# Allegro board FULL.brd
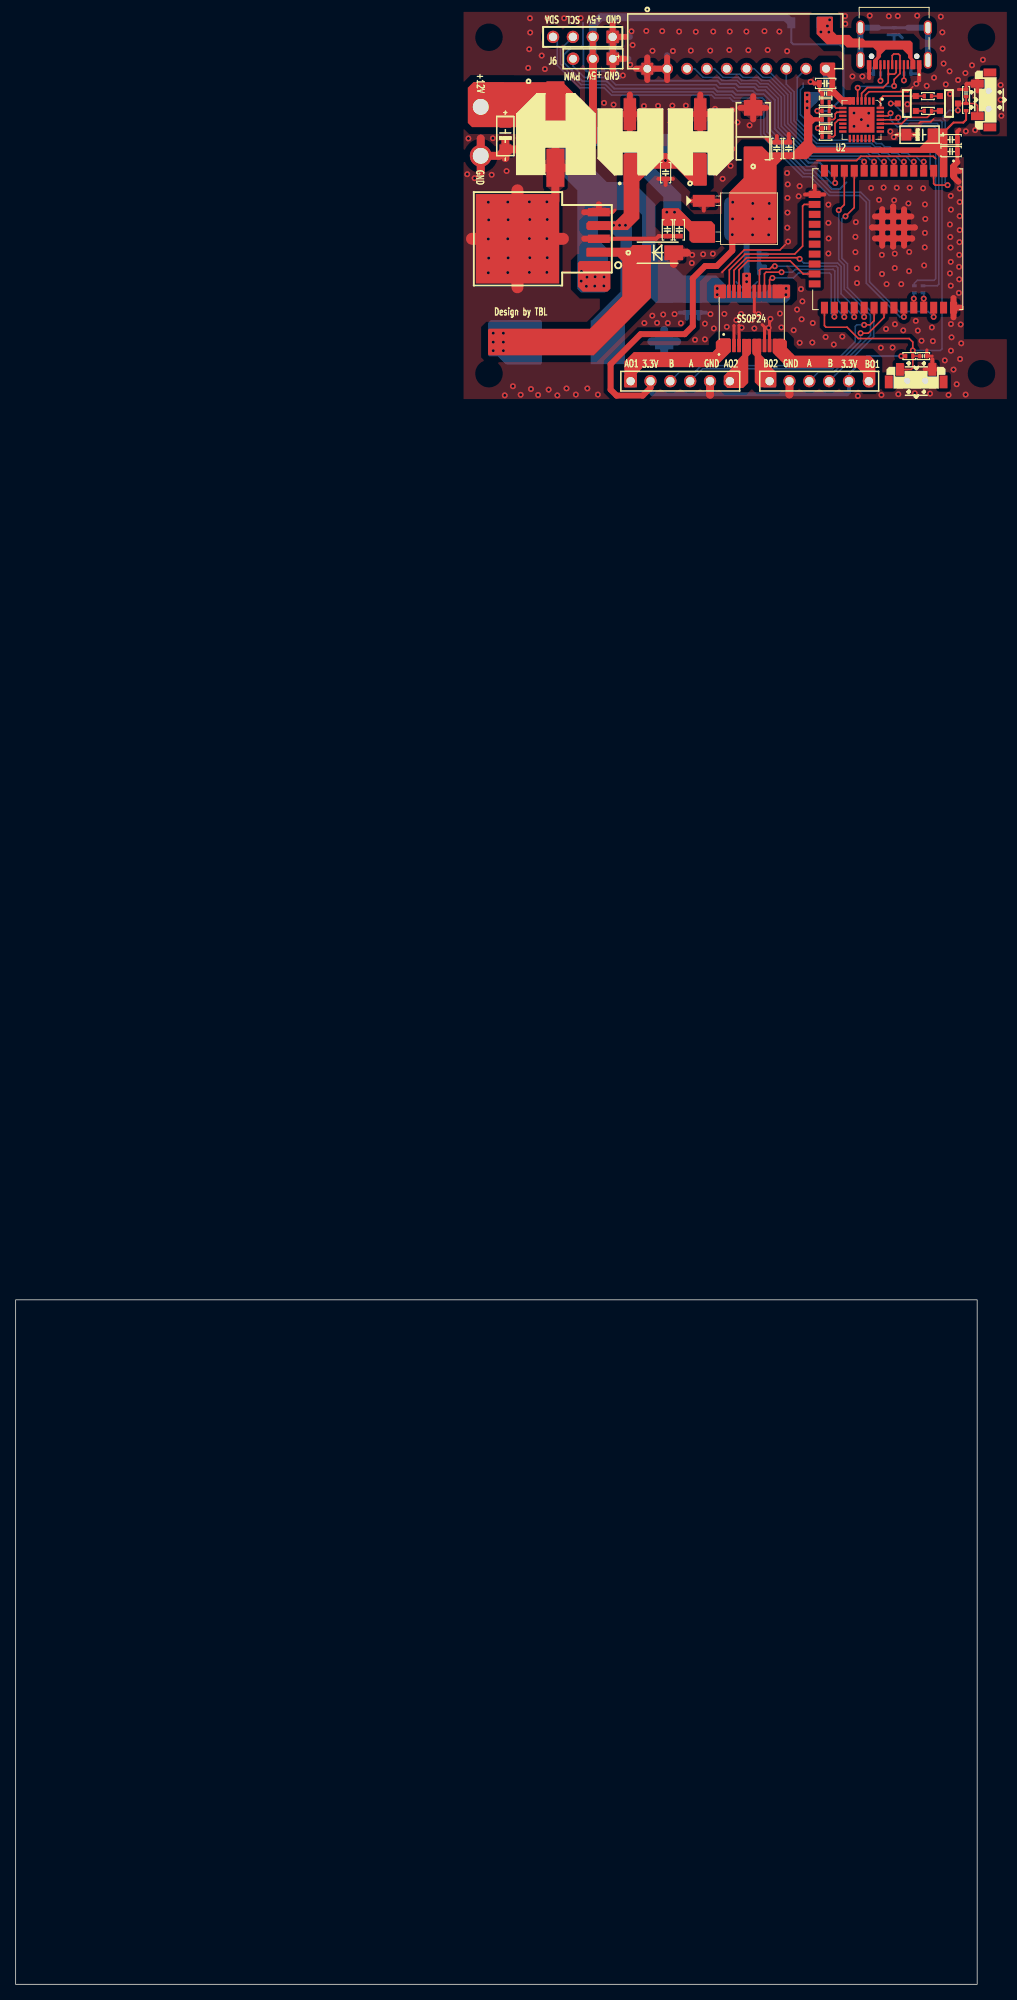
[diagram p0: board, top side]
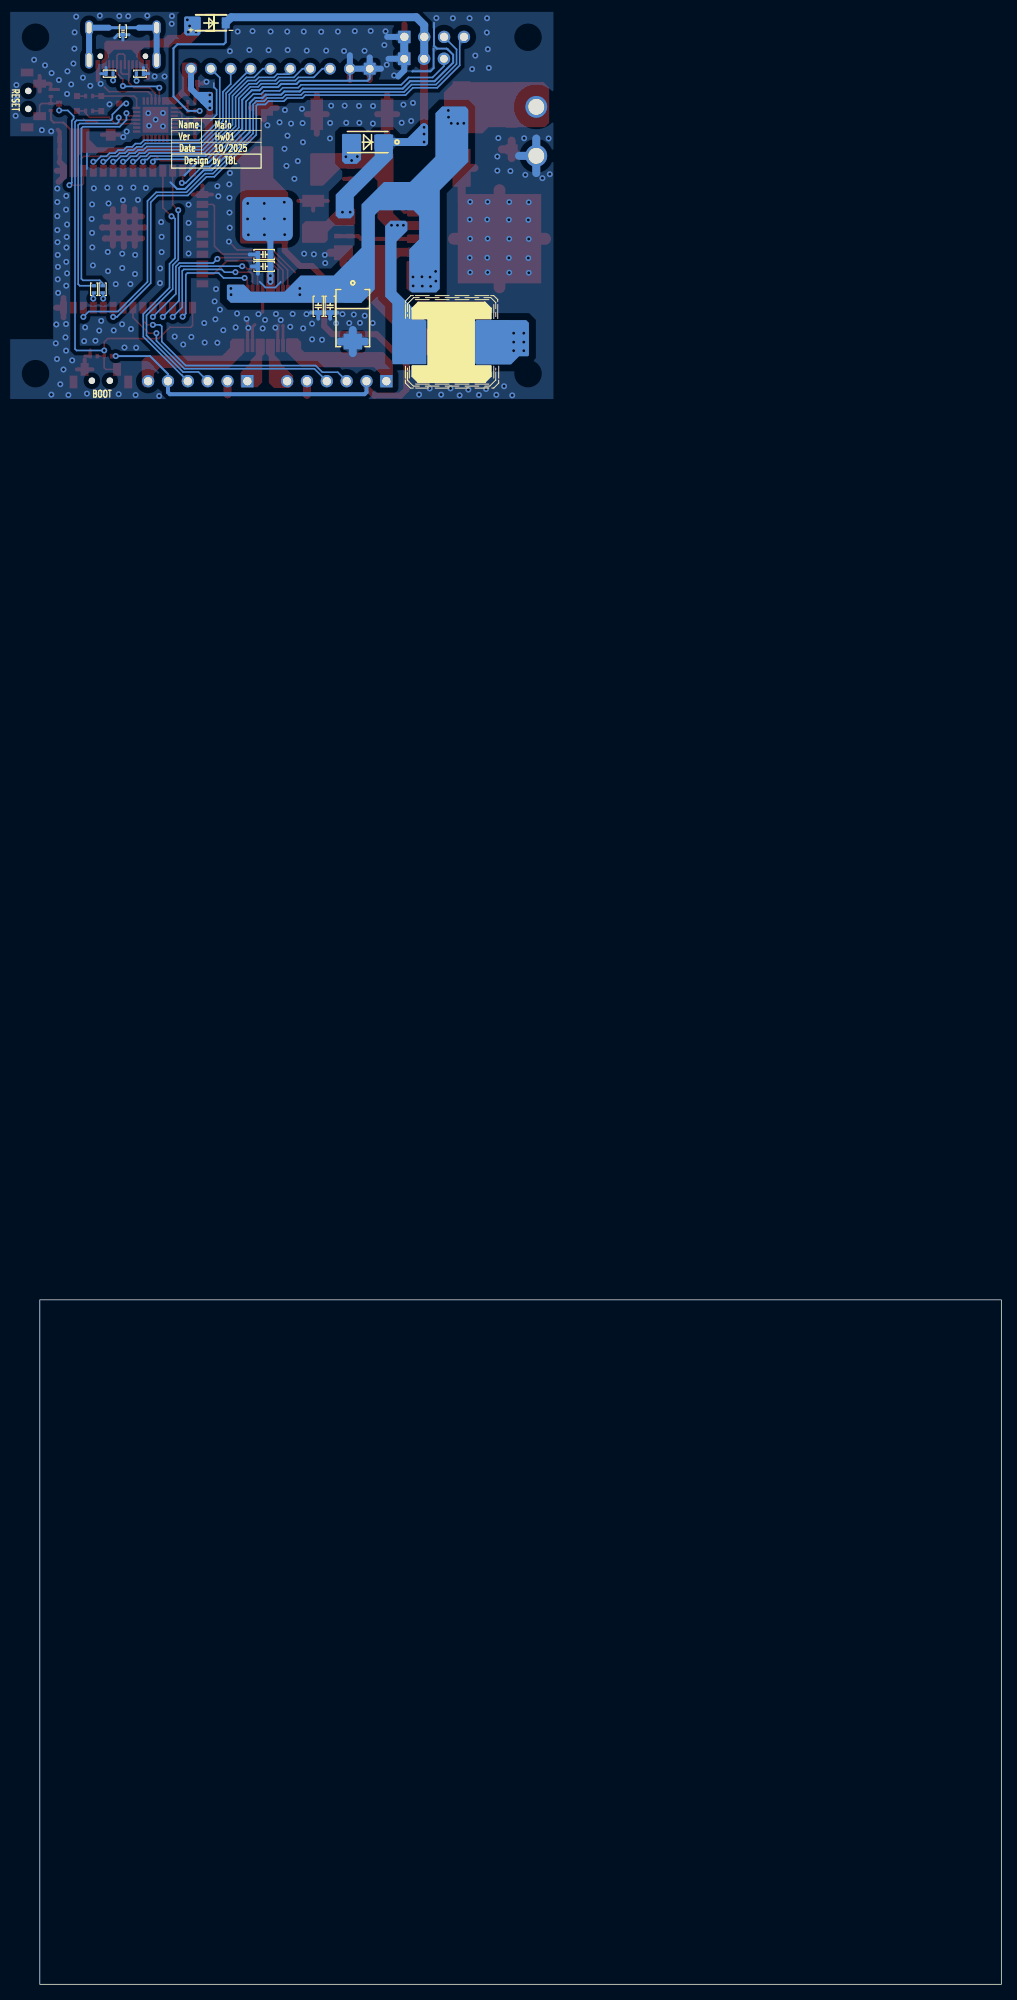
[diagram p1: board, bottom side, seen from below]

Outline 123 x 87.5 mm; copper layers: TOP, BOTTOM. Coordinates in mm from the lower left corner of the outline.
Outline path: rectangle 0,0 123,87.5

## Design rules (mm)
constraint set DEFAULT: min track width 0.203

## Placement (name value [footprint] x y rotation side)
C2  100uF  [C1206]  117.33 236.43 180 top
C3  1uF  [C0603]  119.67 235.79 0 top
C4  0.1uF  [C0603]  119.67 234.27 0 top
C5  0.1uF  [C0402]  121.58 241.77 90 top
C6  0.1uF  [C0402]  116.11 208.13 0 top
C7  1uF  [C0603]  103.61 242.98 180 top
C8  0.1uF  [C0402]  103.61 241.67 180 top
C9  0.1uF  [C0402]  112.38 249.66 270 bottom
C10  0.1uF  [C0402]  103.61 237.27 180 top
C11  470uF  [RAD_SIZE_F]  87.57 235.51 90 top
C12  0.1uF  [C0603]  83.14 231.58 270 top
C13  470uF  [RAD_SIZE_F]  78.57 235.51 90 top
C14  0.1uF  [C0603]  83.37 224.27 270 top
C15  1uF  [C0603]  84.89 224.27 270 top
C16  0.1uF  [C0603]  98.89 234.67 90 top
C17  1uF  [C0603]  97.37 234.67 90 top
C18  100uF  [C2312]  94.34 236.87 90 top
C19  100uF  [C2312]  82.96 212.99 270 bottom
C21  1uF  [C0603]  94.31 219.59 0 bottom
C22  0.1uF  [C0603]  94.31 221.12 0 bottom
C23  0.1uF  [C0603]  85.86 214.49 270 bottom
C30  330uF  [CASE_G]  69.04 236.51 270 top
C31  0.1uF  [C1206]  62.64 237.96 270 top
C32  0.1uF  [C0603]  87.38 214.49 270 bottom
D1  1N4148  [SOD_123]  101.07 250.73 180 bottom
D2  1N5819  [DO_214AC]  81.06 235.49 0 bottom
D3  1N5819  [DO_214AC]  82.13 221.35 0 top
IC1  TB6612FNG  [SSOP24]  94.17 212.94 90 top
J2  TYPE C  [TYPE-C-16P]  112.38 250.11 180 top
J4  HEADER1X10  [SHDRV10W102P0_254_1X10]  80.8 244.87 0 top
J5  -  [HEADER1X4]  72.58 248.93 90 top
J6  -  [HEADER1X3]  73.85 246.14 180 top
J7  HEADER1X6_RIGHT  [HEADER1X6]  96.45 204.92 0 top
J8  HEADER1X6_LEFT  [HEADER1X6]  78.67 204.92 0 top
L1  33uH  [DR127_SMD_IND]  70.39 209.89 0 bottom
Q1  MMBT2222  [SOT_23]  118.24 241.37 270 top
Q2  MMBT2222  [SOT_23]  115.15 239.47 90 top
R1  0  [R0402]  116.06 216.67 90 bottom
R2  10K  [R0402]  121.58 239.97 270 top
R3  10K  [R0402]  114.31 208.13 180 top
R4  0  [R0402]  114.96 216.67 90 bottom
R5  10K  [R0402]  116.7 241.36 0 top
R6  10K  [R0402]  116.7 239.47 0 top
R7  5.1K  [R0402]  114.08 244.23 0 bottom
R8  5.1K  [R0402]  110.19 244.23 180 bottom
R9  10K  [R0402]  103.61 239.47 0 top
R10  10K  [R0402]  103.61 236.17 0 top
R11  10K  [R0402]  103.61 240.57 180 top
R12  1K  [R0402]  103.61 238.37 180 top
SW1  BUTTON  [BUTTON_SMD_2PIN_3X6X3_5_RA]  115.19 204.98 180 top
SW2  BUTTON  [BUTTON_SMD_2PIN_3X6X3_5_RA]  124.48 240.88 270 top
T6  Test_Point_Pwr_80  [TEST_POINT_PWR_80]  59.49 239.99 0 top
T9  Test_Point_Pwr_80  [TEST_POINT_PWR_80]  59.49 233.73 0 top
U1  -  [ESP32_WROOM_32U]  111.56 223.07 270 top
U2  CP2102  [QFN28_5X5]  108.21 238.34 270 top
U3  LM2596S-5.0  [TO_263_5]  67.88 223.12 90 top
U5  LM1086  [DPAK]  91.98 225.69 270 top

## Library data of the parts
C2 C11 C13 C18 C19 C30 = POL_CAP
C3 C4 C7 C12 C14-C17 C21-C23 C32 = NPOL_CAP: User Part Number: ***
C5 C6 C8-C10 C31 = NPOL_CAP
D1 = DIODE
D2 D3 = DIODE_AC
IC1 = TB6612FNG
J2 = TYPE_C_0
J4 = HEADER1X10
J5 = HEADER1X4
J6 = HEADER1X3
J7 J8 = HEADER1X6
L1 = IND_FERRITE
Q1 Q2 = BJT_NPN
R1-R12 = RES
SW1 SW2 = SW_PUSHBUTTON_SPST_2P
T6 T9 = TestPoint
U1 = ESP32_WROOM_32U
U2 = CP2102_QFN28_0
U3 = LM2575_TO
U5 = LM1086_0

## Footprints (pads in the part's own frame, mm; a bottom-side part is the same pattern mirrored in y, then rotated)
BUTTON_SMD_2PIN_3X6X3_5_RA
  round 0.838 hole 0.813: (-1.15,0) (1.15,0)
  rect 1.016x1.626 smd: 1(-2.075,-1.45) 2(2.075,-1.45) 3(-3.5,0.15) 4(3.5,0.15)
C0402
  rect 0.399x0.599 smd: 1(-0.45,0) 2(0.45,0)
C0603
  rect 0.599x0.899 smd: 1(-0.8,0) 2(0.8,0)
C1206
  rect 1.27x1.524 smd: 1(0,0) 2(3.4,0)
C2312
  rect 1.999x2.349 smd: 1(-3,0) 2(3,0)
CASE_G
  rect 4.849x2.301 smd: 1(-4.318,0) 2(4.318,0)
DO_214AC
  rect 2.4x1.9 smd: A(2.05,0) C(-2.05,0)
DPAK
  rect 1.524x2.794 smd: 1(-2.286,-3.95) 3(2.286,-3.95)
  rect 6.299x6.096 smd: 2(0,2.3)
DR127_SMD_IND
  rect 4.318x5.588 smd: 1(-5.334,0) 2(5.334,0)
ESP32_WROOM_32U
  rect 1.5x0.9 smd: 1(-8.75,8.41) 2(-8.75,7.14) 3(-8.75,5.87) 4(-8.75,4.6) 5(-8.75,3.33) 6(-8.75,2.06) 7(-8.75,0.79) 8(-8.75,-0.48) 9(-8.75,-1.75) 10(-8.75,-3.02) 11(-8.75,-4.29) 12(-8.75,-5.56) 13(-8.75,-6.83) 14(-8.75,-8.1) 25(8.75,-8.1) 26(8.75,-6.83) 27(8.75,-5.56) 28(8.75,-4.29) 29(8.75,-3.02) 30(8.75,-1.75) 31(8.75,-0.48) 32(8.75,0.79) 33(8.75,2.06) 34(8.75,3.33) 35(8.75,4.6) 36(8.75,5.87) 37(8.75,7.14) 38(8.75,8.41)
  rect 0.9x1.5 smd: 15(-5.715,-9.35) 16(-4.445,-9.35) 17(-3.175,-9.35) 18(-1.905,-9.35) 19(-0.635,-9.35) 20(0.635,-9.35) 21(1.905,-9.35) 22(3.175,-9.35) 23(4.445,-9.35) 24(5.715,-9.35)
  rect 0.9x0.9 smd: 39_1(-2.9,2.09) 39_2(-1.5,2.09) 39_3(-0.1,2.09) 39_4(-2.9,0.69) 39_5(-1.5,0.69) 39_6(-0.1,0.69) 39_7(-2.9,-0.71) 39_8(-1.5,-0.71) 39_9(-0.1,-0.71)
HEADER1X3
  rect 1.6x1.6 hole 1.001: 1(-2.54,0)
  round 1.6 hole 1.001: 2(0,0) 3(2.54,0)
HEADER1X4
  rect 1.575x1.575 hole 1.067: 1(0,-3.79)
  round 1.575 hole 1.067: 2(0,-1.25) 3(0,1.29) 4(0,3.83)
HEADER1X6
  rect 1.575x1.575 hole 1.067: 1(0,0)
  round 1.575 hole 1.067: 2(2.54,0) 3(5.08,0) 4(7.62,0) 5(10.16,0) 6(12.7,0)
QFN28_5X5
  rect 0.95x0.305 smd: 1(-2.4,1.5) 2(-2.4,1) 3(-2.4,0.5) 4(-2.4,0) 5(-2.4,-0.5) 6(-2.4,-1) 7(-2.4,-1.5) 15(2.4,-1.5) 16(2.4,-1) 17(2.4,-0.5) 18(2.4,0) 19(2.4,0.5) 20(2.4,1) 21(2.4,1.5)
  rect 0.305x0.95 smd: 8(-1.5,-2.4) 9(-1,-2.4) 10(-0.5,-2.4) 11(0,-2.4) 12(0.5,-2.4) 13(1,-2.4) 14(1.5,-2.4) 22(1.5,2.4) 23(1,2.4) 24(0.5,2.4) 25(0,2.4) 26(-0.5,2.4) 27(-1,2.4) 28(-1.5,2.4)
  rect 3.302x3.302 smd: 29(0,0)
R0402
  rect 0.399x0.599 smd: 1(-0.45,0) 2(0.45,0)
RAD_SIZE_F
  rect 4.049x1.6 smd: 1(-3.55,0) 2(3.55,0)
SHDRV10W102P0_254_1X10
  rect 1.501x1.501 hole 1.001: 1(0,0)
  round 1.501 hole 1.001: 2(2.54,0) 3(5.08,0) 4(7.62,0) 5(10.16,0) 6(12.7,0) 7(15.24,0) 8(17.78,0) 9(20.32,0) 10(22.86,0)
SOD_123
  rect 1.016x1.397 smd: 1(-1.854,0) 2(1.854,0)
SOT_23
  rect 0.762x0.762 smd: 1(0,0) 2(1.9,0) 3(0.95,2.291)
SSOP24
  custom 1.7x0.48 smd: 1(-3.46,3.575) 2(-3.46,2.925) 3(-3.46,2.275) 4(-3.46,1.625) 5(-3.46,0.975) 6(-3.46,0.325) 7(-3.46,-0.325) 8(-3.46,-0.975) 9(-3.46,-1.625) 10(-3.46,-2.275) 11(-3.46,-2.925) 12(-3.46,-3.575) 13(3.46,-3.575) 14(3.46,-2.925) 15(3.46,-2.275) 16(3.46,-1.625) 17(3.46,-0.975) 18(3.46,-0.325) 19(3.46,0.325) 20(3.46,0.975) 21(3.46,1.625) 22(3.46,2.275) 23(3.46,2.925) 24(3.46,3.575)
TEST_POINT_PWR_80
  round 2.794 hole 2.032: 1(0,0)
TO_263_5
  rect 1.067x2.794 smd: 1(-3.404,-6.731) 2(-1.702,-6.731) 3(0,-6.731) 4(1.702,-6.731) 5(3.404,-6.731)
  rect 11.43x10.668 smd: 6(0,3.683)
TYPE-C-16P
  round 0.7 hole 0.7 unplated: (-2.89,3.65) (2.89,3.65)
  rect 0.6x1.15 smd: A1_B12(-3.2,4.725) A4_B9(-2.4,4.725) A9_B4(2.4,4.725) A12_B1(3.2,4.725)
  rect 0.3x1.15 smd: A5(-1.25,4.725) A6(-0.25,4.725) A7(0.25,4.725) A8(1.25,4.725) B5(1.75,4.725) B6(0.75,4.725) B7(-0.75,4.725) B8(-1.75,4.725)
  oval 1.05x1.85 hole 0.65x1.45: SH1(-4.32,0) SH2(4.32,0)
  oval 1.05x2.15 hole 0.65x1.75: SH3(-4.32,4.15) SH4(4.32,4.15)

## Nets
+3.3V: C2.1 C3.1 C4.1 C7.1 C8.1 C16.1 C17.1 C18.1 C21.1 C22.1 IC1.19 IC1.20 J4.10 J7.5 J8.2 R2.2 R3.2 R12.2 U1.2 U2.6(VDD) U2.7 U5.2(OUTPUT)
+5V: C14.1 C15.1 D1.2(CATHODE) D2.C(CATHODE) J5.2 J6.2 R9.1 U5.3
+12V: C19.1 C23.1 C30.1 C31.1 C32.1 IC1.13 IC1.14(VM3) IC1.24 T6.1(T) U3.1(VIN)
GND: C2.2 C3.2 C4.2 C5.2 C6.2 C7.2 C8.2 C9.2 C10.2 C11.2 C12.2 C13.2 C14.2 C15.2 C16.2 C17.2 C18.2 C19.2 C21.2 C22.2 C23.2 C30.2 C31.2 C32.2 D3.A IC1.3 IC1.4 IC1.9 IC1.10 IC1.18 J2.A1_B12 J2.A12_B1 J4.1 J4.2 J5.1 J6.1 J7.2 J8.5 R7.2 R8.2 R10.1 R11.2 SW1.1 SW2.1 T9.1(T) U1.1 U1.15 U1.38 U1.39_1 U1.39_2 U1.39_3 U1.39_4 U1.39_5 U1.39_6 U1.39_7 U1.39_8 U1.39_9 U2.3 U2.29 U3.3 U3.5 U3.6 U5.1
VBUS: D1.1 J2.A4_B9 J2.A9_B4(VBUS#A9_B4)
A1: J4.9 U1.4
A2: J4.8 U1.5
A3: J4.7 U1.6
A4: J4.6 U1.7
A5: J4.5 U1.8
A6: J4.4 U1.9
A7: J4.3 U1.10
AIN1: IC1.21 U1.23
AIN2: IC1.22 U1.29
AO1: IC1.1 IC1.2 J8.1
AO2: IC1.5 IC1.6 J8.6
BIN1: IC1.17 U1.28
BIN2: IC1.16 U1.27
BO1: IC1.11 IC1.12 J7.6
BO2: IC1.7 IC1.8 J7.1
D+: J2.A6 J2.B6 U2.4
D-: J2.A7 J2.B7 U2.5
DTR: Q2.2 R5.1 U2.28
EN: C5.1 Q1.3(E) R2.1 SW2.2 U1.3
IO0_BOOT: C6.1 Q2.3(E) R3.1 SW1.2 U1.25
IO2: U1.24
IO12: U1.14
IO23: U1.37
M1_EC_A: J8.4 U1.31
M1_EC_B: J8.3 U1.30
M2_EC_A: J7.3 U1.12
M2_EC_B: J7.4 U1.11
PWM_SV: J6.3 U1.13
PWMA: IC1.23 U1.16
PWMB: IC1.15 U1.26
RST: Q1.2 R6.2 U2.24
RX: R1.2 U2.25
RXD0: R4.1 U1.34
SCL: J5.3 U1.36
SDA: J5.4 U1.33
TX: R4.2 U2.26
TXD0: R1.1 U1.35(TXD0/IO1)
N15842419: C11.1 C12.1 C13.1 D2.A L1.2 U3.4
N15842519: D3.C(CATHODE) L1.1 U3.2
N15929869: C9.1 J2.SH1 J2.SH2 J2.SH3 J2.SH4
N15929977: J2.A5 R7.1
N15930015: J2.B5 R8.1
N15930117: R9.2 R11.1 U2.8
N15930121: C10.1 R12.1 U2.9
N15930125: R10.2 U2.11
N15936616: Q1.1 R5.2
N15936658: Q2.1 R6.1

Pads without a net: J2 A8 B8; SW1 3 4; SW2 3 4; U1 17 18 19 20 21 22 32; U2 1 2 10 12 13 14 15 16 17 18 19 20 21 22 23 27

## Via types
v1: diameter 0.762, hole 0.381, TOP to BOTTOM, 340 vias

## Routing (per net, layer and track width the routed paths; a pad name or vN(x,y) marks a point on that pad's centre or on a via; arc(x,y) is an arc through that point)
+3.3V: length 98.2
  TOP w0.254: 119.01,237.02 119.97,237.98 121.22,237.98 121.58,238.34 R2.2 ; R3.2 v1(113.29,208.13)
  TOP w0.762: J8.2 81.21,204.07 80.22,203.08 76.87,203.08 76.11,203.85 76.11,207.1 79.94,210.93 85.58,210.93 86.62,211.97 86.62,218.07 88.2,219.64 89.69,219.64 91.68,221.63 v1(91.68,223.66) ; v1(101.25,241.51) v1(101.25,240.68) v1(101.25,239.86)
  BOTTOM w0.254: J7.5 106.61,205.85 108.89,208.13 v1(113.29,208.13)
  BOTTOM w0.508: J8.2 81.21,203.52 81.46,203.26 106.35,203.26 106.61,203.52 J7.5
  BOTTOM w0.762: 102.9,241.51 103.66,242.28 J4.10 ; 102.9,241.51 102.09,240.71 ; 102.9,241.51 102.09,241.51 ; 102.09,240.71 102.09,240.7 v1(101.25,239.86) v1(101.25,240.68) ; 102.09,240.71 102.09,241.51 ; 102.09,241.51 v1(101.25,241.51) v1(101.25,240.68) ; 102.09,241.51 v1(101.25,240.68) ; v1(94.27,223.63) 93.5,222.87 C22.1 C21.1 v1(93.5,218.4) v1(93.5,217.64)
  vias: v1(91.73,227.8) v1(91.7,225.66) v1(94.29,227.65) v1(94.28,225.69) v1(96.32,223.63) v1(96.4,227.65) v1(96.43,225.66)
+5V: length 76.3
  TOP w0.254: R9.1 v1(102.55,239.47)
  TOP w0.762: J5.2 73.83,246.16 J6.2
  TOP w1.016: J6.2 v1(73.85,237.37) v1(73.85,236.51) v1(73.85,235.49)
  BOTTOM w0.254: v1(102.55,239.47) 104.06,239.47 105.9,241.31 105.9,247.48 105.39,247.99 99.47,247.99 99.22,248.24 D1.2
  BOTTOM w1.016: 75.72,235.49 74.81,235.49 ; 75.72,235.49 v1(73.85,237.37) v1(73.85,236.51) 73.85,236.46 ; 75.72,235.49 D2.C ; 74.81,235.49 73.85,236.46 ; 74.81,235.49 v1(73.85,235.49) 73.85,236.46 ; J6.2 73.83,246.16 J5.2 73.83,250.43 74.84,251.44 98.51,251.44 D1.2 ; v1(84.28,226.53) v1(83.29,226.53)
+12V:
  vias: v1(68.77,237.88) v1(69.55,237.86) v1(70.37,237.88) v1(70.75,239.53) v1(70.72,238.67) v1(72.37,218.96) v1(72.35,217.71) v1(73.08,218.22) v1(73.01,217.05) v1(74.07,217.08) v1(74.12,218.27) v1(75.27,218.25) v1(75.24,217.1) v1(89.75,216.77) v1(89.75,215.99) v1(98.56,216.77) v1(98.53,215.99)
GND: length 382.6
  TOP w0.203: 117.43,238.44 117.08,238.08 115.76,238.08 115.55,237.88 ; 114.76,242.55 114.13,241.92 109.15,241.92 108.71,241.48 U2.3 ; 98.46,222.39 97.77,221.7 93.2,221.7 90.38,218.88 90.38,218.81 ; 117.69,233.36 117.38,233.66 108.11,233.66 107.58,233.13 102.5,233.13
  TOP w0.381: IC1.18 94.49,213.78 94.52,213.75 ; IC1.10 96.44,212.5 96.53,212.58 ; U3.5 76.39,226.53 76.66,226.81 ; 121.66,242.95 121.58,242.87 C5.2 120.62,242.22 120.61,242.2 ; 116.56,208.91 C6.2 117.24,208.13 ; IC1.9 95.79,211.85 95.49,212.15 ; 91.9,212.02 91.89,212.01 IC1.3 ; R10.1 C10.2 v1(102.62,237.27) ; 92.54,212.07 IC1.4 ; C7.2 102.81,242.02 C8.2 R11.2
  TOP w0.508: SW1.1 118.26,206.43 ; SW1.1 116.28,206.43 ; SW1.1 117.27,207.73 ; C12.2 83.14,230 ; C12.2 82.21,230.78 ; C12.2 84.07,230.78 ; U5.1 88.03,226.73 ; U5.1 89.91,227.98 ; U5.1 86.15,227.98 ; 115.05,236.43 C2.2 112.81,236.43 ; 98.89,236.54 C16.2 C17.2 ; 120.47,232.91 C4.2 C3.2 120.47,236.83 120.71,237.07 ; C17.2 97.37,236.25 ; C17.2 96.58,235.47 96.04,236 ; U1.15 103.44,228.79 ; U1.15 102.21,229.93 ; U1.15 100.98,228.79 ; 121.66,242.95 SW2.1 ; SW2.1 123.03,243.94 ; SW2.1 123.03,241.96 ; J2.A1_B12 115.58,243.39 115.58,243.39 ; C15.2 C14.2 82.27,223.47 81.93,223.13 74.61,223.13 U3.3 ; 101.84,243.29 102.14,242.98 C7.2 ; 109.18,243.7 J2.A12_B1
  TOP w0.762: 120.61,230.41 119.97,231.05 U1.1 ; C11.2 87.57,241.56 ; C11.2 87.57,236.55 ; C11.2 88.86,239.06 ; C11.2 86.29,239.06 ; U1.39_5 U1.39_6 ; U1.39_5 U1.39_4 ; U1.39_5 U1.39_2 ; U1.39_5 U1.39_8 ; U1.39_6 U1.39_3 ; U1.39_6 112.25,222.13 ; U1.39_6 U1.39_9 ; J4.1 80.8,246.3 ; J4.1 80.8,243.43 ; J4.1 J4.2 ; J4.1 79.36,244.87 ; U1.39_9 110.85,222.24 ; U1.39_9 U1.39_8 ; U1.39_9 109.92,223.17 ; U1.1 120.82,231.82 ; U1.1 119.97,232.42 120.47,232.91 ; C18.2 94.34,241.35 ; C18.2 94.34,238.38 ; C18.2 96,239.87 ; C18.2 92.69,239.87 ; U1.39_7 109.92,225.97 ; U1.39_7 110.85,226.91 ; U1.39_7 U1.39_8 ; U1.39_7 U1.39_4 ; U1.38 119.97,215.56 ; U1.38 119.97,213.09 ; U1.38 120.9,214.32 ; U1.39_8 109.56,224.57 109.56,224.57 ; U1.39_3 113.65,222.24 ; U1.39_3 114.66,223.17 114.69,223.15 ; U1.39_3 U1.39_2 ; J4.2 83.34,243.42 ; J4.2 83.34,246.31 ; 115.02,224.57 115.02,224.57 U1.39_2 ; U1.39_1 U1.39_4 ; U1.39_1 113.65,226.91 ; U1.39_1 114.58,225.97 ; U1.39_1 U1.39_2 ; U1.39_4 112.25,227.24 ; J6.1 76.39,248.91 J5.1 ; J6.1 77.87,246.14 ; J6.1 76.39,244.65 ; J5.1 76.37,250.53 ; J5.1 77.97,248.93 ; C13.2 78.57,236.55 ; C13.2 77.29,239.06 ; C13.2 79.86,239.06 ; C13.2 78.57,241.56 ; U3.3 72.73,223.12 ; 74.61,227.54 U3.5 72.73,226.53
  TOP w1.016: J7.2 98.99,203.26 98.97,203.24 ; J8.5 88.83,203.22 88.83,203.21 ; C30.2 69.04,227.98 ; C30.2 67.41,232.19 ; C30.2 69.04,235.1 ; C30.2 70.68,232.19 ; 84.18,219.91 D3.A 85.86,221.35 ; C31.2 63.89,234.56 ; C31.2 62.64,235.68 ; C31.2 62.64,233.44 ; C31.2 61.82,233.73 T9.1 ; T9.1 59.49,235.94 ; T9.1 59.49,231.52
  TOP w1.524: U3.6 v1(62.95,223.12) 58.38,223.12 ; U3.6 70.01,223.12 ; U3.6 64.19,216.93 ; U3.6 64.19,229.32
  BOTTOM w0.203: 92.21,217.64 92.21,217.56 92.87,216.9 94.14,216.9 94.88,217.64 ; 101.1,238.29 100.39,239 100.39,242.17 100.74,242.53 100.74,243.04 ; 116.97,234.05 116.97,232.04
  BOTTOM w0.254: J4.2 83.34,243.32 ; 83.34,243.32 89.75,243.32 90.15,242.92 92.12,242.92 92.52,242.51 94.49,242.51 94.9,242.11 95.89,242.11 97.11,240.88 97.11,237.17 101.42,232.86 102.87,232.86 104.5,231.23 ; 83.34,243.32 81.06,243.32 80.8,243.58 J4.1 ; 72.58,250.73 72.58,247.79 72.22,247.43 70.97,247.43 70.79,247.32 70.12,246.65 70.12,245.65 72.51,243.27 75.63,243.27 76.57,242.33 89.38,242.33 89.75,241.96 91.72,241.96 92.12,241.55 94.09,241.55 94.5,241.14 95.49,241.14 96.15,240.48 96.15,236.77 101.02,231.89 102.02,231.89 104.41,229.5 105.44,229.5 106.28,230.34 ; 72.63,247.43 72.63,244.94 73.03,244.54 75.32,244.54 75.34,244.51
  BOTTOM w0.381: C9.2 113.01,249.21 113.42,248.8 ; C9.2 111.59,249.21 ; C9.2 112.38,248.53 ; 114.53,245.01 R7.2 115.21,244.23 ; 109.74,245.01 R8.2 109.06,244.23
  BOTTOM w0.508: 85.86,213.69 85.86,212.91 ; 85.86,213.69 84.93,213.69 ; 85.86,213.69 87.38,213.69 ; C21.2 C22.2 96.15,221.12 ; C21.2 95.11,218.66 ; C21.2 95.89,219.59 ; 87.38,213.69 88.32,213.69 ; 87.38,213.69 87.38,212.91
  BOTTOM w0.762: J4.1 J4.2 83.34,246.59 ; J4.1 79.36,244.87 ; J4.1 80.8,246.3 ; 77.17,243.88 76.39,244.66 J6.1 78.39,246.14 ; J5.1 78.57,248.93
  BOTTOM w1.016: 84.62,209.99 C19.2 ; C19.2 82.96,211.47 ; C19.2 82.96,208.51 ; C19.2 81.31,209.99 ; T9.1 59.49,235.94 ; T9.1 59.49,231.52 ; T9.1 61.7,233.73 ; J6.1 76.39,248.91 J5.1
  vias: v1(57.77,231.38) v1(57.92,235.95) v1(58.71,230.87) v1(60.46,227.8) v1(60.46,223.1) v1(60.46,218.78) v1(60.51,225.54) v1(60.51,220.66) v1(60.89,231.3) v1(61.04,235.98) v1(62.57,203.11) v1(62.8,231.79) v1(62.95,227.82) v1(62.95,218.81) v1(63,225.56) v1(63,220.69) v1(63.61,204.28) v1(64.35,236) v1(64.47,233.64) v1(64.47,231.84) v1(64.6,203.18) v1(65.56,244.97) v1(65.69,247.36) v1(65.79,251.32) v1(65.72,227.85) v1(65.77,225.59) v1(65.72,223.15) v1(65.77,220.71) v1(65.72,218.83) v1(65.82,249.49) v1(65.92,203.92) v1(66.83,203.16) v1(67.29,246.54) v1(67.7,244.82) v1(67.95,227.85) v1(67.95,223.15) v1(67.95,218.83) v1(68.03,251.32) v1(68,225.59) v1(68,220.71) v1(68.18,203.85) v1(69.3,203.11) v1(70.16,251.32) v1(70.47,204) v1(71.66,203.21) v1(72.27,251.34) v1(73.13,204) v1(74.48,203.21) v1(75.27,240.5) v1(75.5,238.19) v1(76.49,240.27) v1(76.72,237.96) v1(77.68,244) v1(78.62,245.37) v1(78.77,249.64) v1(78.93,247.89) v1(80.37,240.09) v1(80.4,237.86) v1(80.42,212.35) v1(80.68,249.69) v1(81.47,247.15) v1(81.44,213.29) v1(82.05,212.38) v1(82.18,240.12) v1(82.13,237.96) v1(82.71,249.67) v1(82.84,213.45) v1(83.42,212.35) v1(83.8,237.96) v1(84.08,247.13) v1(84.01,240.14) v1(84.28,213.5) v1(84.87,249.62) v1(85.1,212.33) v1(85.73,240.14) v1(85.86,237.93) v1(85.88,235.95) v1(86.37,247.18) v1(86.49,220.03) v1(86.55,221.07) v1(86.9,210.22) v1(87,249.59) v1(87.94,221.14) v1(88.17,212.28) v1(88.17,210.27) v1(88.86,247.18) v1(88.88,213.5) v1(89.19,221.22) v1(89.24,249.62) v1(89.39,237.91) v1(89.34,235.47) v1(89.31,211.67) v1(89.47,239.74) v1(90,233.06) v1(90.43,230.79) v1(90.66,213.52) v1(90.86,237.86) v1(90.96,211.87) v1(91.3,247.25) v1(91.35,249.62) v1(91.32,236.31) v1(91.45,232.45) v1(91.65,239.58) v1(91.7,234.63) v1(92.18,212.74) v1(92.34,238.01) v1(92.79,213.52) v1(92.87,211.77) v1(93.48,249.62) v1(93.73,247.23) v1(93.89,237.63) v1(94.19,212.76) v1(94.5,211.67) v1(95.03,213.5) v1(95.79,249.67) v1(96.2,247.25) v1(96.32,211.74) v1(96.55,212.89) v1(97.7,249.62) v1(97.77,213.57) v1(97.95,211.8) v1(98.69,247.1) v1(98.69,231.53) v1(98.76,230.08) v1(98.74,228.36) v1(98.74,226.48) v1(98.71,224.55) v1(98.81,222.77) v1(99.52,211.44) v1(99.96,214.08) v1(100.16,228.56) v1(100.29,229.85) v1(100.29,209.84) v1(100.46,216.7) v1(100.54,212.84) v1(100.64,215.12) v1(101.68,243.19) v1(101.96,212.35) v1(101.91,209.87) v1(103.61,210.58) v1(103.97,227.49) v1(103.97,225.16) v1(104,223.17) v1(103.97,221.24) v1(104.66,209.61) v1(105.75,210.63) v1(106.1,251.6) v1(106.13,250.61) v1(107.04,243.88) v1(107.25,239.2) v1(107.25,237.5) v1(107.47,225.26) v1(107.42,223.38) v1(107.42,221.42) v1(107.6,219.34) v1(107.63,217.46) v1(107.73,203.03) v1(108.19,238.36) v1(108.31,243.88) v1(109.02,237.58) v1(109.13,239.18) v1(109.25,251.65) v1(109.43,229.63) v1(110.45,228.1) v1(110.68,209.2) v1(110.75,203.16) v1(110.8,221.07) v1(110.83,218.63) v1(111.03,229.68) v1(111.34,211.59) v1(111.41,217.33) v1(111.69,251.57) v1(111.89,236.84) v1(112.17,209.23) v1(112.33,236.13) v1(112.38,228.05) v1(112.45,221.22) v1(112.45,219.39) v1(112.48,212.2) v1(112.71,229.65) v1(112.83,251.6) v1(112.91,203.26) v1(113.29,217.33) v1(113.55,211.41) v1(114.08,240.32) v1(114.21,227.65) v1(114.28,218.98) v1(114.36,229.65) v1(114.31,221.45) v1(115.02,203.39) v1(115.15,212.63) v1(115.22,242.94) v1(115.32,251.65) v1(115.4,211.39) v1(115.88,210.09) v1(116.09,229.58) v1(116.29,222.03) v1(116.21,219.72) v1(116.31,227.52) v1(116.36,225.66) v1(116.31,223.89) v1(116.54,242.68) v1(116.97,203.34) v1(117.2,211.8) v1(117.33,210.04) v1(117.48,243.72) v1(118.35,251.52) v1(118.55,249.51) v1(118.57,247.43) v1(118.7,245.53) v1(118.85,207.58) v1(118.98,242.86) v1(119.34,203.16) v1(119.46,244.54) v1(119.51,241.64) v1(119.51,224.95) v1(119.57,223.35) v1(119.59,222.01) v1(119.51,218.7) v1(119.62,228.61) v1(119.64,226.86) v1(119.62,220.18) v1(119.62,217.13) v1(119.64,212.23) v1(119.64,208.82) v1(119.72,210.53) v1(119.97,206.41) v1(120.38,204.53) v1(120.56,243.42) v1(120.68,219.54) v1(120.66,216.22) v1(120.76,229.55) v1(120.76,227.82) v1(120.76,226.02) v1(120.76,224.24) v1(120.73,222.69) v1(120.71,221.07) v1(120.71,217.94) v1(120.89,212.18) v1(120.81,207.76) v1(120.96,209.76) v1(121.5,244.31) v1(121.55,236.87) v1(121.52,203.21) v1(122.33,245.3) v1(122.74,237.02) v1(123.73,246.01) v1(125.99,242.78) v1(125.99,240.9) v1(126.09,238.85)
VBUS:
  vias: v1(103,249.57) v1(103.84,250.33) v1(104.02,249.54) v1(104.12,251.11)
A1: length 26.5
  TOP w0.203: U1.4 v1(116.16,232.98)
  BOTTOM w0.203: J4.9 99.98,243.73 99.98,238.36 102.61,235.73 109.66,235.73 110.09,235.29 110.77,235.29 111.17,234.88 111.87,234.88 112.28,234.48 112.97,234.48 113.38,234.07 114.07,234.07 114.48,233.66 115.17,233.66 115.86,232.98 v1(116.16,232.98)
A2: length 25.7
  TOP w0.203: v1(114.89,232.98) U1.5
  BOTTOM w0.203: v1(114.89,232.98) 114.59,232.98 113.91,233.66 113.21,233.66 112.8,234.07 112.11,234.07 111.7,234.48 111.01,234.48 110.6,234.88 109.93,234.88 109.49,235.32 102.44,235.32 99.58,238.19 99.58,241.9 98.58,242.9 J4.8
A3: length 25.8
  TOP w0.203: U1.6 113.62,232.77 113.62,232.78 v1(113.62,232.98)
  BOTTOM w0.203: J4.7 99.17,241.73 99.17,238.02 102.28,234.91 109.32,234.91 109.76,234.48 110.43,234.48 110.84,234.07 111.53,234.07 111.94,233.66 112.63,233.66 113.32,232.98 v1(113.62,232.98)
A4: length 27.1
  TOP w0.203: U1.7 v1(112.35,232.98)
  BOTTOM w0.203: v1(112.35,232.98) 112.05,232.98 111.36,233.66 110.67,233.66 110.26,234.07 109.59,234.07 109.15,234.51 102.11,234.51 98.76,237.85 98.76,241.57 96.57,243.76 95.58,243.76 94.47,244.87 J4.6
A5: length 28.7
  TOP w0.203: U1.8 v1(111.08,232.98)
  BOTTOM w0.203: J4.5 90.96,244.37 91.16,244.17 92.63,244.17 93.04,243.76 95.01,243.76 95.41,243.35 96.4,243.35 98.36,241.4 98.36,237.68 101.94,234.1 108.98,234.1 109.42,233.66 110.09,233.66 110.78,232.98 v1(111.08,232.98)
A6: length 29.7
  TOP w0.203: U1.9 v1(109.81,232.98)
  BOTTOM w0.203: v1(109.81,232.98) 109.81,233.06 109.61,233.26 109.25,233.26 108.82,233.7 101.77,233.7 97.95,237.52 97.95,241.23 96.23,242.95 95.24,242.95 94.84,243.35 92.87,243.35 92.47,243.76 90.5,243.76 89.39,244.87 J4.4
A7: length 31
  TOP w0.203: U1.10 v1(108.54,232.98)
  BOTTOM w0.203: v1(108.54,232.98) 108.54,233.09 108.34,233.29 101.6,233.29 97.54,237.35 97.54,241.06 96.06,242.54 95.08,242.54 94.67,242.95 92.7,242.95 92.3,243.35 90.33,243.35 89.93,243.76 87.96,243.76 86.85,244.87 J4.3
AIN1: length 13.6
  TOP w0.203: IC1.21 92.54,219.17 93.67,220.3 99.07,220.3 100.74,218.63 U1.23
AIN2: length 26.4
  TOP w0.203: v1(108.54,213.14) U1.29 ; v1(100.29,220.56) 100.13,220.71 93.5,220.71 91.89,219.1 IC1.22
  BOTTOM w0.203: v1(108.54,213.14) 105.59,216.09 105.59,219.58 105.15,220.03 100.82,220.03 v1(100.29,220.56)
BIN1: length 21.4
  TOP w0.203: IC1.17 95.14,219.09 95.34,219.29 96.48,219.29 96.81,219.62 v1(97.11,219.62) ; U1.28 v1(107.27,213.14)
  BOTTOM w0.203: v1(107.27,213.14) 105.19,215.22 105.19,219.42 104.98,219.62 v1(97.11,219.62)
BIN2: length 19.1
  TOP w0.203: v1(97.98,218.86) 95.99,218.86 95.79,218.65 IC1.16 ; U1.27 v1(106,213.14)
  BOTTOM w0.203: v1(97.98,218.86) 99.37,218.86 99.73,219.21 104.58,219.21 104.78,219.01 104.78,214.36 v1(106,213.14)
D+: length 9.3
  TOP w0.203: 111.62,244.17 111.62,245.38 J2.B6 ; 111.62,244.17 112.42,244.17 112.63,244.37 J2.A6 ; 111.62,244.17 111.62,243.1 110.98,242.45 108.95,242.45 108.21,241.72 U2.4
D-: length 13
  TOP w0.203: v1(112.38,242.66) 112.38,243.49 113.13,244.24 J2.B7 113.13,246.54 112.92,246.75 112.33,246.75 112.13,246.54 J2.A7 ; v1(107.71,242.43) U2.5
  BOTTOM w0.203: v1(112.38,242.66) 112.33,242.61 107.89,242.61 v1(107.71,242.43)
DTR: length 7
  TOP w0.203: U2.28 110.61,241.03 110.95,241.37 Q2.2 116.24,241.37 R5.1
EN: length 20.5
  TOP w0.203: SW2.2 123.03,240.16 122.77,240.42 R2.1 ; R2.1 121.57,240.42 Q1.3 120.53,240.42 v1(120.53,239.53) ; R2.1 C5.1 ; v1(119.21,229.98) 117.63,229.98 117.43,230.19 U1.3
  BOTTOM w0.203: v1(120.53,239.53) 119.41,239.53 118.68,238.8 118.68,238.46 118.9,238.23 118.9,230.29 v1(119.21,229.98)
IO0_BOOT: length 62
  TOP w0.203: R3.1 114.76,206.64 114.55,206.43 SW1.2 ; R3.1 C6.1 ; R3.1 v1(114.76,208.85) 114.76,209.92 114.31,210.37 107.8,210.37 106.35,211.82 103.66,211.82 103.46,212.02 U1.25 ; Q2.3 v1(111.95,240.42)
  BOTTOM w0.203: v1(114.76,208.85) 118.3,208.85 118.5,209.05 118.5,238.06 118.3,238.26 113.93,238.26 113.72,238.47 113.72,239 112.3,240.42 111.95,240.42 v1(111.95,240.42)
M1_EC_A: length 30
  TOP w0.203: v1(108.08,211.06) 109.08,211.06 111.08,213.06 U1.31
  BOTTOM w0.203: v1(108.08,211.06) 108.08,210.09 104.5,206.51 87.87,206.51 J8.4
M1_EC_B: length 32.1
  TOP w0.203: v1(108.54,212.13) 109.28,212.13 109.81,212.66 U1.30
  BOTTOM w0.203: v1(108.54,212.13) 107.6,212.13 107.4,211.92 107.4,209.98 104.34,206.92 87.71,206.92 86.85,206.07 84.89,206.07 J8.3
M2_EC_A: length 33.3
  TOP w0.203: U1.12 106,227.49 v1(105.29,226.78)
  BOTTOM w0.203: v1(105.29,226.78) 105.29,220.46 106,219.75 106,216.7 109.35,213.34 109.35,210.78 104.68,206.11 102.71,206.11 J7.3
M2_EC_B: length 31.7
  TOP w0.203: v1(106.15,225.99) 107.27,227.11 107.27,231.82 U1.11
  BOTTOM w0.203: v1(106.15,225.99) 106,225.99 105.7,225.69 105.7,220.63 106.41,219.92 106.41,216.87 109.76,213.51 109.76,210.61 104.85,205.7 104.84,205.7 J7.4
PWM_SV: length 44.4
  TOP w0.203: v1(104.83,230.26) 104.73,230.36 U1.13
  BOTTOM w0.203: v1(104.83,230.26) 104.34,230.26 102.22,232.37 101.22,232.37 96.63,236.97 96.63,240.68 95.69,241.63 94.7,241.63 94.29,242.03 92.32,242.03 91.92,242.44 89.95,242.44 89.58,242.81 76.77,242.81 75.83,243.75 72.75,243.75 71.31,245.2 J6.3
PWMA: length 20.2
  TOP w0.203: U1.16 100.87,227.52 100.67,227.31 100.67,222.18 99.65,221.17 93.31,221.17 91.29,219.15 91.29,216.45 IC1.23
PWMB: length 16.5
  TOP w0.203: IC1.15 96.44,217.88 96.68,218.12 v1(96.81,218.12) ; U1.26 v1(104.73,213.17)
  BOTTOM w0.203: v1(96.81,218.12) 99.5,218.12 100.13,218.76 104.12,218.76 104.32,218.55 104.32,213.57 v1(104.73,213.17)
RST: length 8.5
  TOP w0.203: Q1.2 118.24,239.47 R6.2 117.15,239.17 116.62,238.64 114.15,238.64 113.34,237.84 U2.24
RX: length 30.8
  TOP w0.203: v1(112.91,238.62) 112.91,238.54 112.71,238.34 U2.25
  BOTTOM w0.203: R1.2 117.89,217.12 118.09,217.33 118.09,237.65 117.89,237.86 113.11,237.86 112.91,238.06 v1(112.91,238.62)
RXD0: length 1.9
  TOP w0.203: U1.34 v1(114.89,215.48)
  BOTTOM w0.203: R4.1 114.89,216.15 v1(114.89,215.48)
SCL: length 74.7
  TOP w0.203: U1.36 v1(117.43,213.14)
  BOTTOM w0.203: J5.3 69.69,247.34 69.69,245.47 72.33,242.83 75.45,242.83 76.39,241.89 89.2,241.89 89.57,241.52 91.54,241.52 91.95,241.12 93.91,241.12 94.32,240.71 95.31,240.71 95.71,240.3 95.71,236.59 100.85,231.46 101.84,231.46 104.24,229.07 108.11,229.07 109.23,227.95 109.23,217.61 113.01,213.83 116.74,213.83 v1(117.43,213.14)
SDA: length 71
  TOP w0.203: U1.33 v1(113.62,213.14)
  BOTTOM w0.203: v1(113.62,213.14) 113.12,213.14 108.82,217.44 108.82,227.78 107.94,228.66 104.07,228.66 101.68,231.05 100.68,231.05 95.31,236.42 95.31,240.14 95.14,240.3 94.15,240.3 93.74,240.71 91.78,240.71 91.37,241.12 89.41,241.12 89.04,241.49 76.22,241.49 75.28,242.43 72.16,242.43 69.29,245.3 69.29,248.59 68.94,248.93 J5.4
TX: length 31
  TOP w0.203: U2.26 111.58,238.84 v1(111.92,239.18)
  BOTTOM w0.203: v1(111.92,239.18) 111.92,238.31 112.78,237.45 117.48,237.45 117.69,237.25 117.69,218.02 117.48,217.82 115.34,217.82 114.96,217.43 R4.2
TXD0: length 1.9
  TOP w0.203: U1.35 v1(116.16,215.48)
  BOTTOM w0.203: R1.1 116.16,216.12 v1(116.16,215.48)
N15842419: length 1.5
  BOTTOM w0.762: v1(78.01,224.85) v1(77.25,224.85) v1(76.49,224.85)
  vias: v1(82.38,233.64) v1(83.12,233.13) v1(83.85,233.61)
N15842519: length 13.4
  TOP w1.016: v1(62.39,211.06) v1(62.39,209.92) v1(62.39,208.82)
  BOTTOM w1.016: v1(62.39,209.92) 62.41,209.9 65.07,209.9 ; v1(62.39,209.92) v1(62.39,208.82) 63.99,208.82 L1.1 65.07,209.9 ; v1(62.39,209.92) v1(62.39,211.06) 63.91,211.06 65.07,209.9
  vias: v1(61.09,211.06) v1(61.09,209.92) v1(61.09,208.82)
N15929869: length 16.9
  BOTTOM w0.381: 110.33,250.11 C9.1 114.18,250.11
  BOTTOM w0.762: 110.33,250.11 J2.SH2 J2.SH4 ; J2.SH3 J2.SH1 114.18,250.11
N15929977: length 2.9
  TOP w0.203: v1(113.63,243.37) J2.A5
  BOTTOM w0.203: R7.1 113.63,243.37 v1(113.63,243.37)
N15930015: length 3
  TOP w0.203: J2.B5 v1(110.63,243.32)
  BOTTOM w0.203: v1(110.63,243.32) 110.64,243.33 R8.1
N15930117: length 2.9
  TOP w0.203: U2.8 104.93,239.84 104.71,240.07 104.06,240.07 ; 104.06,240.07 R11.1 ; 104.06,240.07 R9.2
N15930121: length 3.6
  TOP w0.203: U2.9 105.71,239.34 105.66,239.3 105.04,239.3 104.83,239.09 104.83,238.57 104.63,238.37 R12.1 C10.1
N15930125: length 3.5
  TOP w0.203: R10.2 104.6,236.17 104.81,236.37 104.81,237.89 105.25,238.34 U2.11
N15936616: length 1.1
  TOP w0.203: R5.2 118.23,241.36 Q1.1
N15936658: length 1.1
  TOP w0.203: R6.1 116.24,239.47 Q2.1

## Copper pours and planes (outline as drawn; the poured copper is in the pictures)
+3.3V on TOP (solid shape): 94.06,218.68 94.06,215.63 93.99,215.55 92.97,215.55 92.95,215.58 92.95,218.68 93.05,218.78 93.96,218.78
+3.3V on TOP (solid shape): 104.83,245.55 104.83,242.28 105.87,241.23 107.3,241.23 107.35,241.18 107.35,240.37 107.27,240.29 105.67,240.29 104.6,241.36 103.89,241.36 103.84,241.41 103.84,242.22 104.12,242.5 104.12,243.34 104.13,243.35 104.13,243.58 103.74,243.98 103.28,243.98 102.88,244.38 102.88,245.43 103.11,245.65 104.73,245.65
+3.3V on TOP (solid shape): 101.66,241.82 101.66,239.05 102.04,238.67 103.28,238.67 103.36,238.59 103.36,238.16 103.31,238.11 102.27,238.11 101.91,237.75 101.91,235.34 102.45,234.81 115.65,234.81 116.67,235.82 116.67,237.2 116.7,237.22 119.08,237.22 119.18,237.12 119.18,231.07 119.11,231 118.3,231 118.22,231.07 118.22,233.51 117.63,234.1 102.01,234.1 101.23,233.31 98.1,233.31 97.34,232.55 97.34,222.69 97.19,222.54 91.37,222.54 91.27,222.64 91.27,229.04 93.12,230.9 93.12,234.81 93.25,234.93 95.49,234.93 96.27,234.15 99.35,234.15 100.85,235.65 100.85,241.84 100.92,241.92 101.56,241.92
+5V on TOP (solid shape): 86.44,225.38 88.98,225.38 89.47,224.9 89.47,222.72 89.39,222.64 86.49,222.64 86.19,222.95 86.19,223.99 85.38,224.8 82.91,224.8 82.66,225.05 82.66,226.86 82.84,227.04 84.79,227.04
+5V on BOTTOM (solid shape): 80.17,236.28 80.17,233.74 85.15,228.76 85.15,226.1 84.79,225.74 83.24,225.74 82.84,226.15 82.84,228.46 77.83,233.46 77.83,236.23 78.09,236.48 79.97,236.48
+12V on TOP (solid shape): 76.08,220.23 76.08,216.75 75.7,216.37 72.55,216.37 71.91,217 71.91,220.03 72.17,220.28 76.03,220.28
+12V on TOP (solid shape): 90.84,217.23 90.84,215.61 90.76,215.53 89.39,215.53 89.31,215.61 89.31,217.08 89.49,217.26 90.81,217.26
+12V on TOP (solid shape): 99.07,217.15 99.07,215.71 98.89,215.53 96.91,215.53 96.83,215.61 96.83,217.21 96.88,217.26 98.97,217.26
+12V on TOP (solid shape): 69.99,243.14 71.31,241.82 71.31,237.07 70.85,236.61 66.38,236.61 65.59,237.4 58.38,237.4 57.84,237.93 57.84,242.43 58.58,243.16
+12V on BOTTOM (solid shape): 72.4,239.18 72.4,233.61 75.62,230.39 78.98,230.39 81.85,227.52 81.85,221.98 85.4,218.42 89.64,218.42 91.7,216.37 95.99,216.37 96.88,217.26 98.97,217.26 99.07,217.15 99.07,215.43 98.58,214.95 81.87,214.95 80.14,216.67 80.14,226.17 79.53,226.78 75.19,226.78 74.48,226.07 74.48,223.05 75.75,221.78 75.75,216.6 75.42,216.27 72.3,216.27 71.84,216.72 71.84,229.32 68.21,232.95 68.21,239.68 68.56,240.04 71.53,240.04
GND on TOP: 57.3,202.64 57.3,252.13 126.79,252.13 126.79,236.23 121.29,236.23 121.29,210.29 126.79,210.29 126.79,202.64 ; 5 cut-outs
GND on BOTTOM: 57.3,238.16 62.35,239.99 57.3,241.82 57.3,252.13 126.79,252.13 126.79,236.23 121.29,236.23 121.29,210.29 126.79,210.29 126.79,202.64 57.3,202.64 ; 7 cut-outs
VBUS on TOP (solid shape): 104.55,251.44 104.55,249.64 105.01,249.18 106.64,249.18 107.09,248.73 108.39,248.73 108.67,248.45 114.46,248.45 114.74,248.17 114.74,246.24 115.07,245.91 115.07,244.87 115.02,244.82 114.51,244.82 114.49,244.84 114.49,245.93 114.16,246.26 114.16,246.64 113.49,247.3 111.31,247.3 110.7,246.7 110.7,246.36 110.27,245.93 110.27,244.87 110.22,244.82 109.74,244.82 109.68,244.87 109.68,245.96 110.12,246.39 110.12,247.15 109.68,247.58 106.33,247.58 105.93,247.99 103.77,247.99 102.47,249.29 102.47,251.44 102.55,251.52 104.48,251.52
VBUS on BOTTOM (solid shape): 104.53,251.42 104.53,249.36 104.27,249.11 102.67,249.11 102.45,249.34 102.45,251.42 102.57,251.55 104.4,251.55
AO1 on TOP (solid shape): 91.45,210.3 91.45,208.67 89.49,206.72 80.27,206.72 79.46,205.9 79.46,204.35 79.26,204.15 77.96,204.15 77.86,204.25 77.86,207.43 79.08,208.65 89.16,208.65 89.57,209.05 89.57,209.94 90.03,210.4 91.35,210.4
AO2 on TOP (solid shape): 94.06,210.17 94.06,208.44 93.71,208.09 93.71,204.71 93.05,204.05 91.04,204.05 90.58,204.51 90.58,205.6 92.23,207.25 92.23,207.53 92.95,208.24 92.95,210.3 92.97,210.32 93.91,210.32
BO1 on TOP (solid shape): 98.66,210.02 98.66,209.18 99.65,208.19 109.3,208.19 109.96,207.53 109.96,204.51 109.61,204.15 108.82,204.15 108.41,204.56 108.41,205.88 107.65,206.64 98.76,206.64 96.86,208.54 96.86,210.27 96.93,210.35 98.33,210.35
BO2 on TOP (solid shape): 95.36,210.3 95.36,208.26 96.04,207.58 96.04,207.3 97.31,206.03 97.31,204.28 97.19,204.15 95.18,204.15 94.55,204.79 94.55,208.11 94.24,208.42 94.24,210.25 94.34,210.35 95.31,210.35
N15842419 on TOP (solid shape): 88.4,233.92 88.4,230.01 88.35,229.96 86.72,229.96 84.59,232.09 81.39,232.09 79.79,230.49 79.79,225.71 78.32,224.24 73.21,224.24 73.01,224.44 73.01,225.11 73.26,225.36 76.74,225.36 77.78,226.4 77.78,233.87 77.99,234.07 88.25,234.07
N15842419 on BOTTOM (solid shape): 84.34,236.43 84.34,233.06 83.98,232.7 82.46,232.7 81.9,233.26 81.9,236.41 82.02,236.54 84.23,236.54
N15842419 on BOTTOM (solid shape): 78.82,224.75 78.82,215.73 77.91,214.82 77.91,207.5 77.63,207.22 73.62,207.22 73.59,207.25 73.59,212.58 77.38,216.37 77.38,222.77 75.98,224.17 75.98,225.18 76.23,225.44 78.14,225.44
N15842519 on TOP (solid shape): 81.26,222.23 81.26,215.55 73.95,208.24 60.54,208.24 60.43,208.34 60.43,211.49 60.56,211.62 73.44,211.62 77.6,215.78 77.6,220.25 77.02,220.84 73.06,220.84 73.01,220.89 73.01,221.88 73.11,221.98 78.62,221.98 78.95,222.31 81.19,222.31
N15842519 on BOTTOM (solid shape): 67.32,212.56 67.32,207.22 67.17,207.07 62.72,207.07 61.68,208.11 60.56,208.11 60.43,208.24 60.43,212.38 60.79,212.74 67.14,212.74
+3.3V on BOTTOM (solid shape): 96.35,228.46 96.89,228.23 97.11,227.7 97.11,223.63 96.89,223.09 96.35,222.87 91.4,222.87 90.86,223.09 90.63,223.63 90.63,227.7 90.86,228.23 91.4,228.46

Small or netless copper shapes (teardrops, artwork), in the pictures only: 241 on TOP, 99 on BOTTOM

## Text on the board
Ref Des/Silkscreen Bottom: Hw01 | Main | 10/2025 | Design by TBL | Date | Ver | Name | BOOT | RESET
Ref Des/Silkscreen Top: Design by TBL | AO1 | 3.3V | B | A | GND | AO2 | B02 | BO1 | SDA | SCL | PWM | +5V | +12V
